# EAGLE board Solenoids (EAGLE 6.6.0)
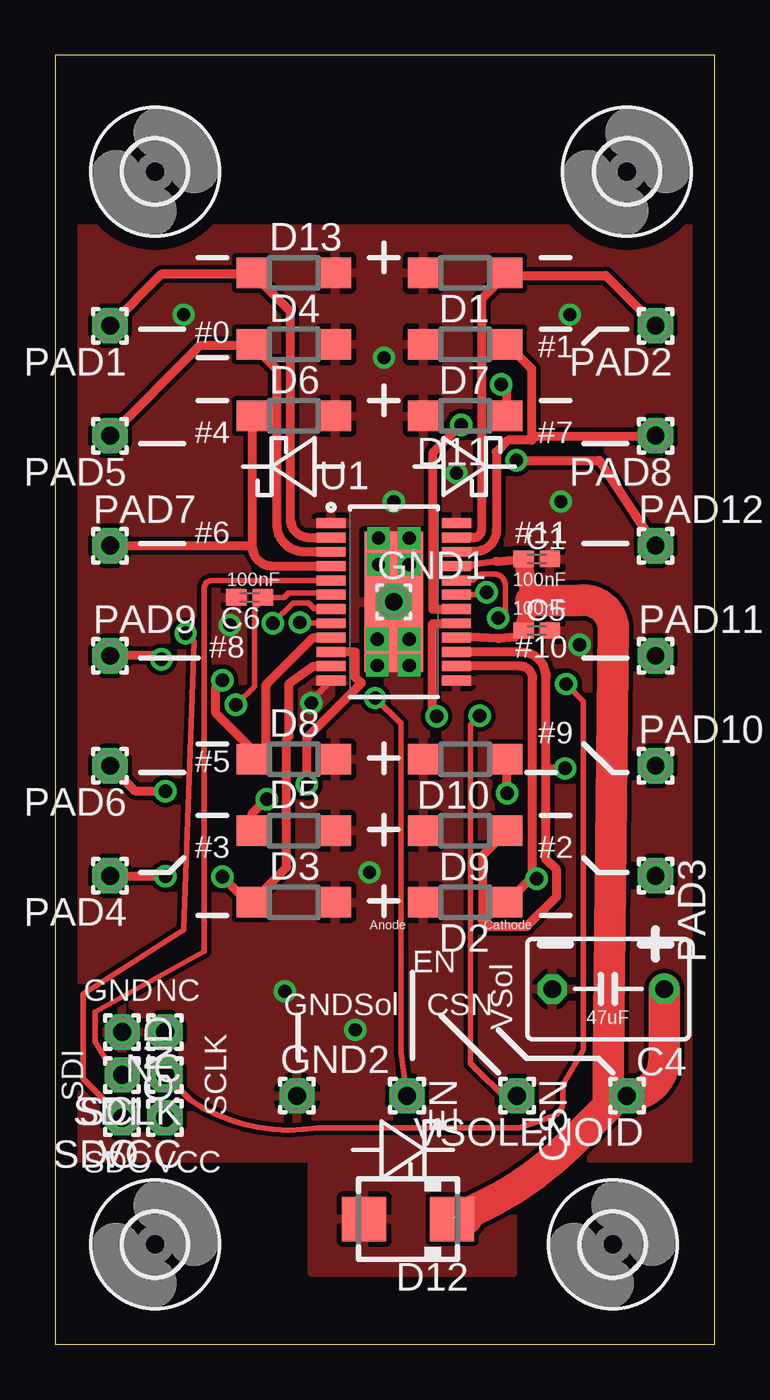
[diagram p0: board, top side]
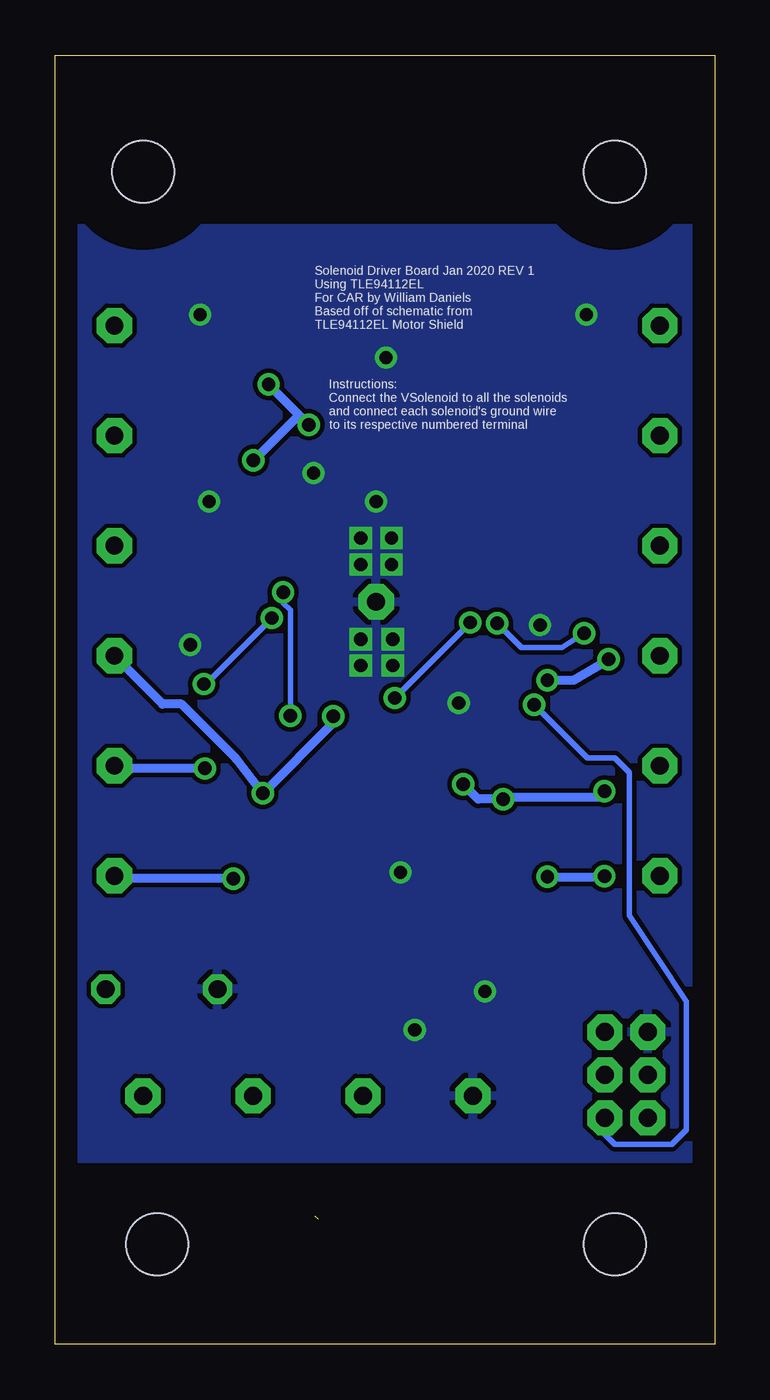
[diagram p1: board, bottom side, seen from below]

Size 30 x 58.6 mm. Coordinates in mm from the lower left corner, seen from the top.
Outline: 30,58.6 0,58.6 0,0 30,0 30,58.6
Copper layers (1*16): Top 0.035mm / dielectric 1.5mm / Bottom 0.035mm
Design rules "default": minimum track width 10mil, minimum drill 24mil, track to track 8mil, track to pad 8mil, pad to pad 8mil, via to via 8mil, smd to smd 8mil, copper to edge 40mil, drill to drill 8mil, minimum pad ring 10mil, minimum via ring 8mil, stop-mask expansion 4mil, vias tented up to drill 0mil, thermal gap 10mil
Net classes: 1 Solenoids: width 0.406 mm

## Footprints (pad centres in the part's own frame; a part is rotated, then mirrored left to right if it is on the bottom)
C0402K = smd 0.925 x 0.74: 1 -0.6,0; 2 0.6,0
C050-045X075 = drill 0.813 octagon: 1 -2.54,0; 2 2.54,0
1,6/0,8 = drill 0.813 pad 1.6 octagon: 1 0,0
SOD123 = smd 1.4 x 1.4: A 1.9,0; C -1.9,0
SMA = smd 2 x 2: A 2,0; C -2,0
2,8 = hole 2.8: 0,0
SOP65P600X170-25N = smd 0.45 x 1.31: 1 -3.575,-2.845; 2 -2.925,-2.845; 3 -2.275,-2.845; 4 -1.625,-2.845; 5 -0.975,-2.845; 6 -0.325,-2.845; 7 0.325,-2.845; 8 0.975,-2.845; 9 1.625,-2.845; 10 2.275,-2.845; 11 2.925,-2.845; 12 3.575,-2.845; 13 3.575,2.845; 14 2.925,2.845; 15 2.275,2.845; 16 1.625,2.845; 17 0.975,2.845; 18 0.325,2.845; 19 -0.325,2.845; 20 -0.975,2.845; 21 -1.625,2.845; 22 -2.275,2.845; 23 -2.925,2.845; 24 -3.575,2.845 | smd 6.4 x 2.65: 25 0,0

## Placement (x,y rotation side)
C1  100nF  [C0402K]  21.9,35.7 0 top
C4  47uF  [C050-045X075]  25.15,16.15 180 top
C5  100nF  [C0402K]  21.9,32.45 0 top
C6  100nF  [C0402K]  8.85,33.95 180 top
CSN  [1,6/0,8]  21,11.3 270 top
D1  MBR0520LT  [SOD123]  18.65,48.7 180 top
D2  MBR0520LT  [SOD123]  18.65,20.1 180 top
D3  MBR0520LT  [SOD123]  10.85,20.1 0 top
D4  MBR0520LT  [SOD123]  10.85,45.45 0 top
D5  MBR0520LT  [SOD123]  10.85,23.35 0 top
D6  MBR0520LT  [SOD123]  10.85,42.2 0 top
D7  MBR0520LT  [SOD123]  18.65,45.45 180 top
D8  MBR0520LT  [SOD123]  10.85,26.6 0 top
D9  MBR0520LT  [SOD123]  18.65,23.35 180 top
D10  MBR0520LT  [SOD123]  18.65,26.6 180 top
D11  MBR0520LT  [SOD123]  18.65,42.2 180 top
D12  MBRA340T3  [SMA]  16.05,5.7 180 top
D13  MBR0520LT  [SOD123]  10.85,48.7 0 top
EN  [1,6/0,8]  16,11.3 270 top
GND  [1,6/0,8]  3.05,14.2 270 top
GND1  [1,6/0,8]  15.4,33.75 0 top
GND2  [1,6/0,8]  11,11.3 0 top
H1  MOUNT-HOLE2.8  [2,8]  4.55,53.3 0 top
H2  MOUNT-HOLE2.8  [2,8]  26,53.3 0 top
H3  MOUNT-HOLE2.8  [2,8]  4.55,4.55 0 top
H4  MOUNT-HOLE2.8  [2,8]  25.35,4.55 0 top
NC  [1,6/0,8]  5,14.2 180 top
PAD1  [1,6/0,8]  2.5,46.3 180 top
PAD2  [1,6/0,8]  27.3,46.3 180 top
PAD3  [1,6/0,8]  27.3,21.3 270 top
PAD4  [1,6/0,8]  2.5,21.3 180 top
PAD5  [1,6/0,8]  2.5,41.3 180 top
PAD6  [1,6/0,8]  2.5,26.3 180 top
PAD7  [1,6/0,8]  2.5,36.3 0 top
PAD8  [1,6/0,8]  27.3,41.3 180 top
PAD9  [1,6/0,8]  2.5,31.3 0 top
PAD10  [1,6/0,8]  27.3,26.3 0 top
PAD11  [1,6/0,8]  27.3,31.3 0 top
PAD12  [1,6/0,8]  27.3,36.3 0 top
SCLK  [1,6/0,8]  5,12.25 180 top
SDI  [1,6/0,8]  3.05,12.25 180 top
SDO  [1,6/0,8]  3.05,10.3 180 top
U1  TLE94112EL  [SOP65P600X170-25N]  15.4,33.75 270 top
VCC  [1,6/0,8]  5,10.3 180 top
VSOLENOID  [1,6/0,8]  26,11.3 180 top

## Library data of the parts
C1 C4-C6 = rcl
CSN EN GND GND1 GND2 NC PAD1-PAD12 SCLK SDI SDO VCC VSOLENOID = wirepad
D1-D13 = diode
H1-H4 = holes
U1 = TLE94112EL

## Nets
GND: C1.2 C4.2 C5.2 C6.2 D1.A D2.A D3.A D4.A D5.A D6.A D7.A D8.A D9.A D10.A D11.A D12.A D13.A GND1.1 GND2.1 GND.1 U1.1 U1.12 U1.13 U1.24 U1.25
N$1 [Solenoids]: D13.C PAD1.1 U1.2
N$2 [Solenoids]: D1.C PAD2.1 U1.23
N$3 [Solenoids]: D2.C PAD3.1 U1.14
N$4 [Solenoids]: D3.C PAD4.1 U1.11
N$5 [Solenoids]: D4.C PAD5.1 U1.3
N$6 [Solenoids]: D5.C PAD6.1 U1.10
N$7 [Solenoids]: D6.C PAD7.1 U1.4
N$8 [Solenoids]: D7.C PAD8.1 U1.22
N$9 [Solenoids]: D8.C PAD9.1 U1.9
N$10 [Solenoids]: D9.C PAD10.1 U1.15
N$11 [Solenoids]: D10.C PAD11.1 U1.17
N$12 [Solenoids]: D11.C PAD12.1 U1.18
N$22: EN.1 U1.8
N$23: CSN.1 U1.19
N$24: SCLK.1 U1.20
N$25: SDI.1 U1.5
N$26: SDO.1 U1.7
VCC: C6.1 U1.6 VCC.1
VDD: C1.1 C4.1 C5.1 D12.C U1.16 U1.21 VSOLENOID.1

## Tracks (layer width: path | path; a pad name or v marks a point on that pad's centre or on a via)
GND  (via drill 0.6)
  Top 0.254: U1.12 12.54,30.17 11.65,29.28 v11.65,29.15
  other vias: 23.85,31.8 18.25,39.6 7.95,32.7 16.1,30.85 14.65,30.85 15.4,38.3 10.45,16.05 14.7,35.45 16.1,35.45 16.1,36.65 14.7,36.65 23,38.3 5.85,46.8 23.4,46.8 13.65,14.3 14.95,44.85 14.3,21.45 14.65,32.05 16.1,32.05
  pour Top: -1.95,50.7 30.55,50.7 30.55,8.45 20.8,8.45 20.8,3.25 11.7,3.25 11.7,8.45 9.75,8.45 -1.95,8.45
  pour Bottom: -2.6,8.45 -2.6,50.7 31.85,50.7 32.5,8.45
N$1
  Top 0.406: U1.2 11.56,36.67 arc-90 10.69,37.55 10.69,46.96 8.96,48.68 D13.C 8.76,48.63 4.84,48.63 2.52,46.32 PAD1.1
N$2
  Top 0.406: U1.23 19.04,36.67 arc90 19.38,37.01 19.38,47.52 20.54,48.68 D1.C 20.72,48.58 25.04,48.58 27.3,46.32 PAD2.1
N$3  (via drill 0.61)
  Top 0.406: 21.71,21.25 21.71,30.26 arc90 21.15,30.83 U1.14 | 21.71,21.25 20.57,20.11 D2.C | v21.89,21.18 21.71,21.25
  Bottom 0.406: v21.89,21.18 27.2,21.18 27.3,21.28 PAD3.1
N$4  (via drill 0.61)
  Top 0.406: 10.65,30.03 10.65,27.64 10.54,27.53 10.54,21.68 8.96,20.11 D3.C 8.76,20.11 v7.62,21.25 | U1.11 11.75,30.83 | v5.03,21.28 2.52,21.28 PAD4.1
  Top 0.41: 10.65,30.03 11.75,30.83
  Bottom 0.406: v5.03,21.28 5.05,21.25 v7.62,21.25
N$5
  Top 0.406: U1.3 12.54,36.03 11.31,36.03 arc-90 10.08,37.27 10.08,44.31 8.96,45.43 D4.C 8.76,45.38 6.58,45.38 PAD5.1 2.52,41.32
N$6  (via drill 0.61)
  Top 0.406: v11.45,25.47 11.45,27.58 13.91,30.04 13.91,30.07 13.66,30.32 13.66,31.46 12.57,31.46 U1.10 | v9.62,24.78 8.96,24.12 8.96,23.36 D5.C | v5.03,25.14 3.67,25.14 2.52,26.28 PAD6.1
  Bottom 0.406: v11.45,25.47 10.77,24.78 v9.62,24.78 9.45,24.88 5.28,24.88 v5.03,25.14
N$7
  Top 0.406: 8.96,36.29 arc90 9.88,35.37 U1.4 | 8.96,36.29 8.96,42.18 D6.C | 8.96,36.29 2.52,36.29 PAD7.1
N$8
  Top 0.406: 21.66,41.29 21.66,44.34 20.57,45.43 D7.C | 21.66,41.29 21.66,41.09 20.59,41.09 20.06,40.56 20.06,37.01 arc-90 19.09,36.03 18.26,36.03 U1.22 | 21.66,41.29 PAD8.1
N$9  (via drill 0.61)
  Top 0.406: U1.9 11.73,32.12 9.6,29.99 9.6,27.25 8.96,26.61 D8.C 9.04,26.97 7.31,28.69 7.31,29.89 v7.62,30.19 | v4.83,31.13 4.67,31.3 PAD9.1
  Bottom 0.406: v4.83,31.13 6.42,30.19 v7.62,30.19
N$10  (via drill 0.61)
  Top 0.406: 22.32,26.18 22.32,30.35 arc90 21.2,31.46 18.26,31.46 U1.15 | 22.32,26.18 22.32,22.04 22.8,21.56 22.8,20.36 21.43,18.99 19.77,18.99 arc-90 19.43,19.34 19.43,22.22 20.54,23.34 D9.C | 22.32,26.18 v23.19,26.18
  Bottom 0.406: v23.19,26.18 27.2,26.18 27.3,26.28 PAD10.1
N$11  (via drill 0.6, 0.61)
  Top 0.406: U1.17 18.23,32.76 17.17,32.76 17.17,28.73 v17.35,28.55 | 20.54,26.61 D10.C v20.55,25.05
  Bottom 0.406: PAD11.1 27.3,31.29 25.11,29.1 24.25,29.1 21.75,26.6 v20.55,25.05 17.35,28.25 v17.35,28.55
N$12  (via drill 0.61)
  Top 0.406: v18.46,41.8 17.17,40.51 17.17,33.42 18.23,33.42 U1.18 | v20.29,43.63 20.54,43.38 D11.C | v20.98,40.17 24.73,40.17 27.3,36.31 PAD12.1
  Bottom 0.406: v20.29,43.63 18.91,42.24 | 18.91,42.24 v18.46,41.8 | 18.91,42.24 v20.98,40.17
N$13  (via drill 0.6)
  other vias: 17.35,28.55
N$22  (via drill 0.61)
  Top 0.254: v11.12,32.81 11.12,32.78 12.54,32.78 U1.8 | v14.55,29.38 15.72,28.21 15.72,13.28 EN.1
  Bottom 0.254: v14.55,29.38 v11.12,32.81
N$23  (via drill 0.61)
  Top 0.254: v19.63,34.18 19.63,34.08 U1.19 | v19.3,28.57 18.89,28.16 18.89,12.77 20.65,11.02 CSN.1
  Bottom 0.254: v19.63,34.18 19.63,33.7 19.3,33.37 v19.3,28.57
N$24  (via drill 0.61)
  Top 0.254: v20.14,33.01 20.47,33.34 20.47,34.5 arc90 19.95,35.02 19.5,35.02 arc45 19.12,34.86 19,34.74 U1.20 | v23.24,30.02 24.02,29.23 24.02,13.38 23.09,11.79 23.09,11.04 arc-71 22.61,10.37 21.1,9.85 11.96,9.85 arc-43 6.14,11.12 5.02,12.23 SCLK.1
  Bottom 0.254: v20.14,33.01 23.14,30.02 v23.24,30.02
N$25
  Top 0.254: 6.78,17.86 6.78,34.36 arc-90 7.14,34.71 12.54,34.71 U1.5
  Top 0.256: SDI.1 2.23,13.07 1.83,13.76 1.83,15.11 6.78,17.86
N$26  (via drill 0.61)
  Top 0.254: v9.9,32.78 10.82,33.7 11.53,33.7 11.78,33.44 12.54,33.44 U1.7 | v5.94,32.33 6.32,31.95 5.85,18.85 1.29,15.94 1.29,14.01
  Top 0.256: SDO.1 1.29,12.06 1.29,14.01
  Bottom 0.254: v9.9,32.78 8.79,31.68 6.95,31.68 v5.94,32.33
VCC  (via drill 0.61)
  Top 0.254: U1.6 12.54,34.16 10.61,34.16 10.41,33.95 9.47,33.95 C6.1 9.42,33.83 9.06,33.47 9.06,29.91 v8.22,29.07
  Bottom 0.254: 1.3,9.75 1.95,9.1
  Bottom 0.256: v8.22,29.07 5.8,26.65 4.55,26.65 3.9,26 3.9,19.5 1.3,15.6 1.3,9.75 | 1.95,9.1 4.55,9.1 5,9.55 VCC.1
VDD  (1 unrouted)
  Top 0.254: 21.28,35.68 C1.1 | 21.28,32.45 C5.1 | 21.18,35.48 C1.1 | 18.25,35.4 U1.21 | 20.99,35.48 C1.1
  Top 0.305: 18.87,35.4 arc17 18.94,35.43 19.95,35.58 arc-13 20.06,35.59
  Top 0.406: 21.28,32.45 20.9,32.15 20.17,32.08 18.85,32.15 U1.16 | 18.25,35.4 18.87,35.4 | 20.06,35.59 C1.1
  Top 0.813: 21.28,32.45 21.63,33.81 21.28,35.68
  Top 1.422: 21.63,33.81 23.85,33.81 arc-90 25.38,32.63 25.15,12.95 25.15,12.15 | C4.1 27.69,12.99 arc-90 VSOLENOID.1 arc-90 25.15,12.15 | 25.15,12.15 25.15,10.85 23.4,9.1 arc-25 D12.C | 18.7,5.7 18.2,5.85

## Text on the board
tplace: #0 | #1 | #4 | #7 | #6 | #11 | 100nF | 100nF | 100nF | #8 | #10 | #9 | #5 | #3 | #2 | Anode | Cathode | EN | GND | NC | GNDSol | CSN | 47uF | VSol | SDI | SCLK | SDO | VCC
bplace: Solenoid Driver Board Jan 2020 REV 1 / Using TLE94112EL / For CAR by William Daniels / Based off of schematic from / TLE94112EL Motor Shield | Instructions: / Connect the VSolenoid to all the solenoids / and connect each solenoid's ground wire / to its respective numbered terminal